# Altium PCB Bender_main.PcbDoc (part 1 of 2)
Units mm, origin at the board's own origin, x right, y up, seen from the top; angles counter-clockwise.
Board outline 153 x 119 mm, 2 copper layers (Top Layer, Bottom Layer); 318 components, 305 nets, 1119 pads, 323 vias.
Unrouted connection lines stored in the file: 2.
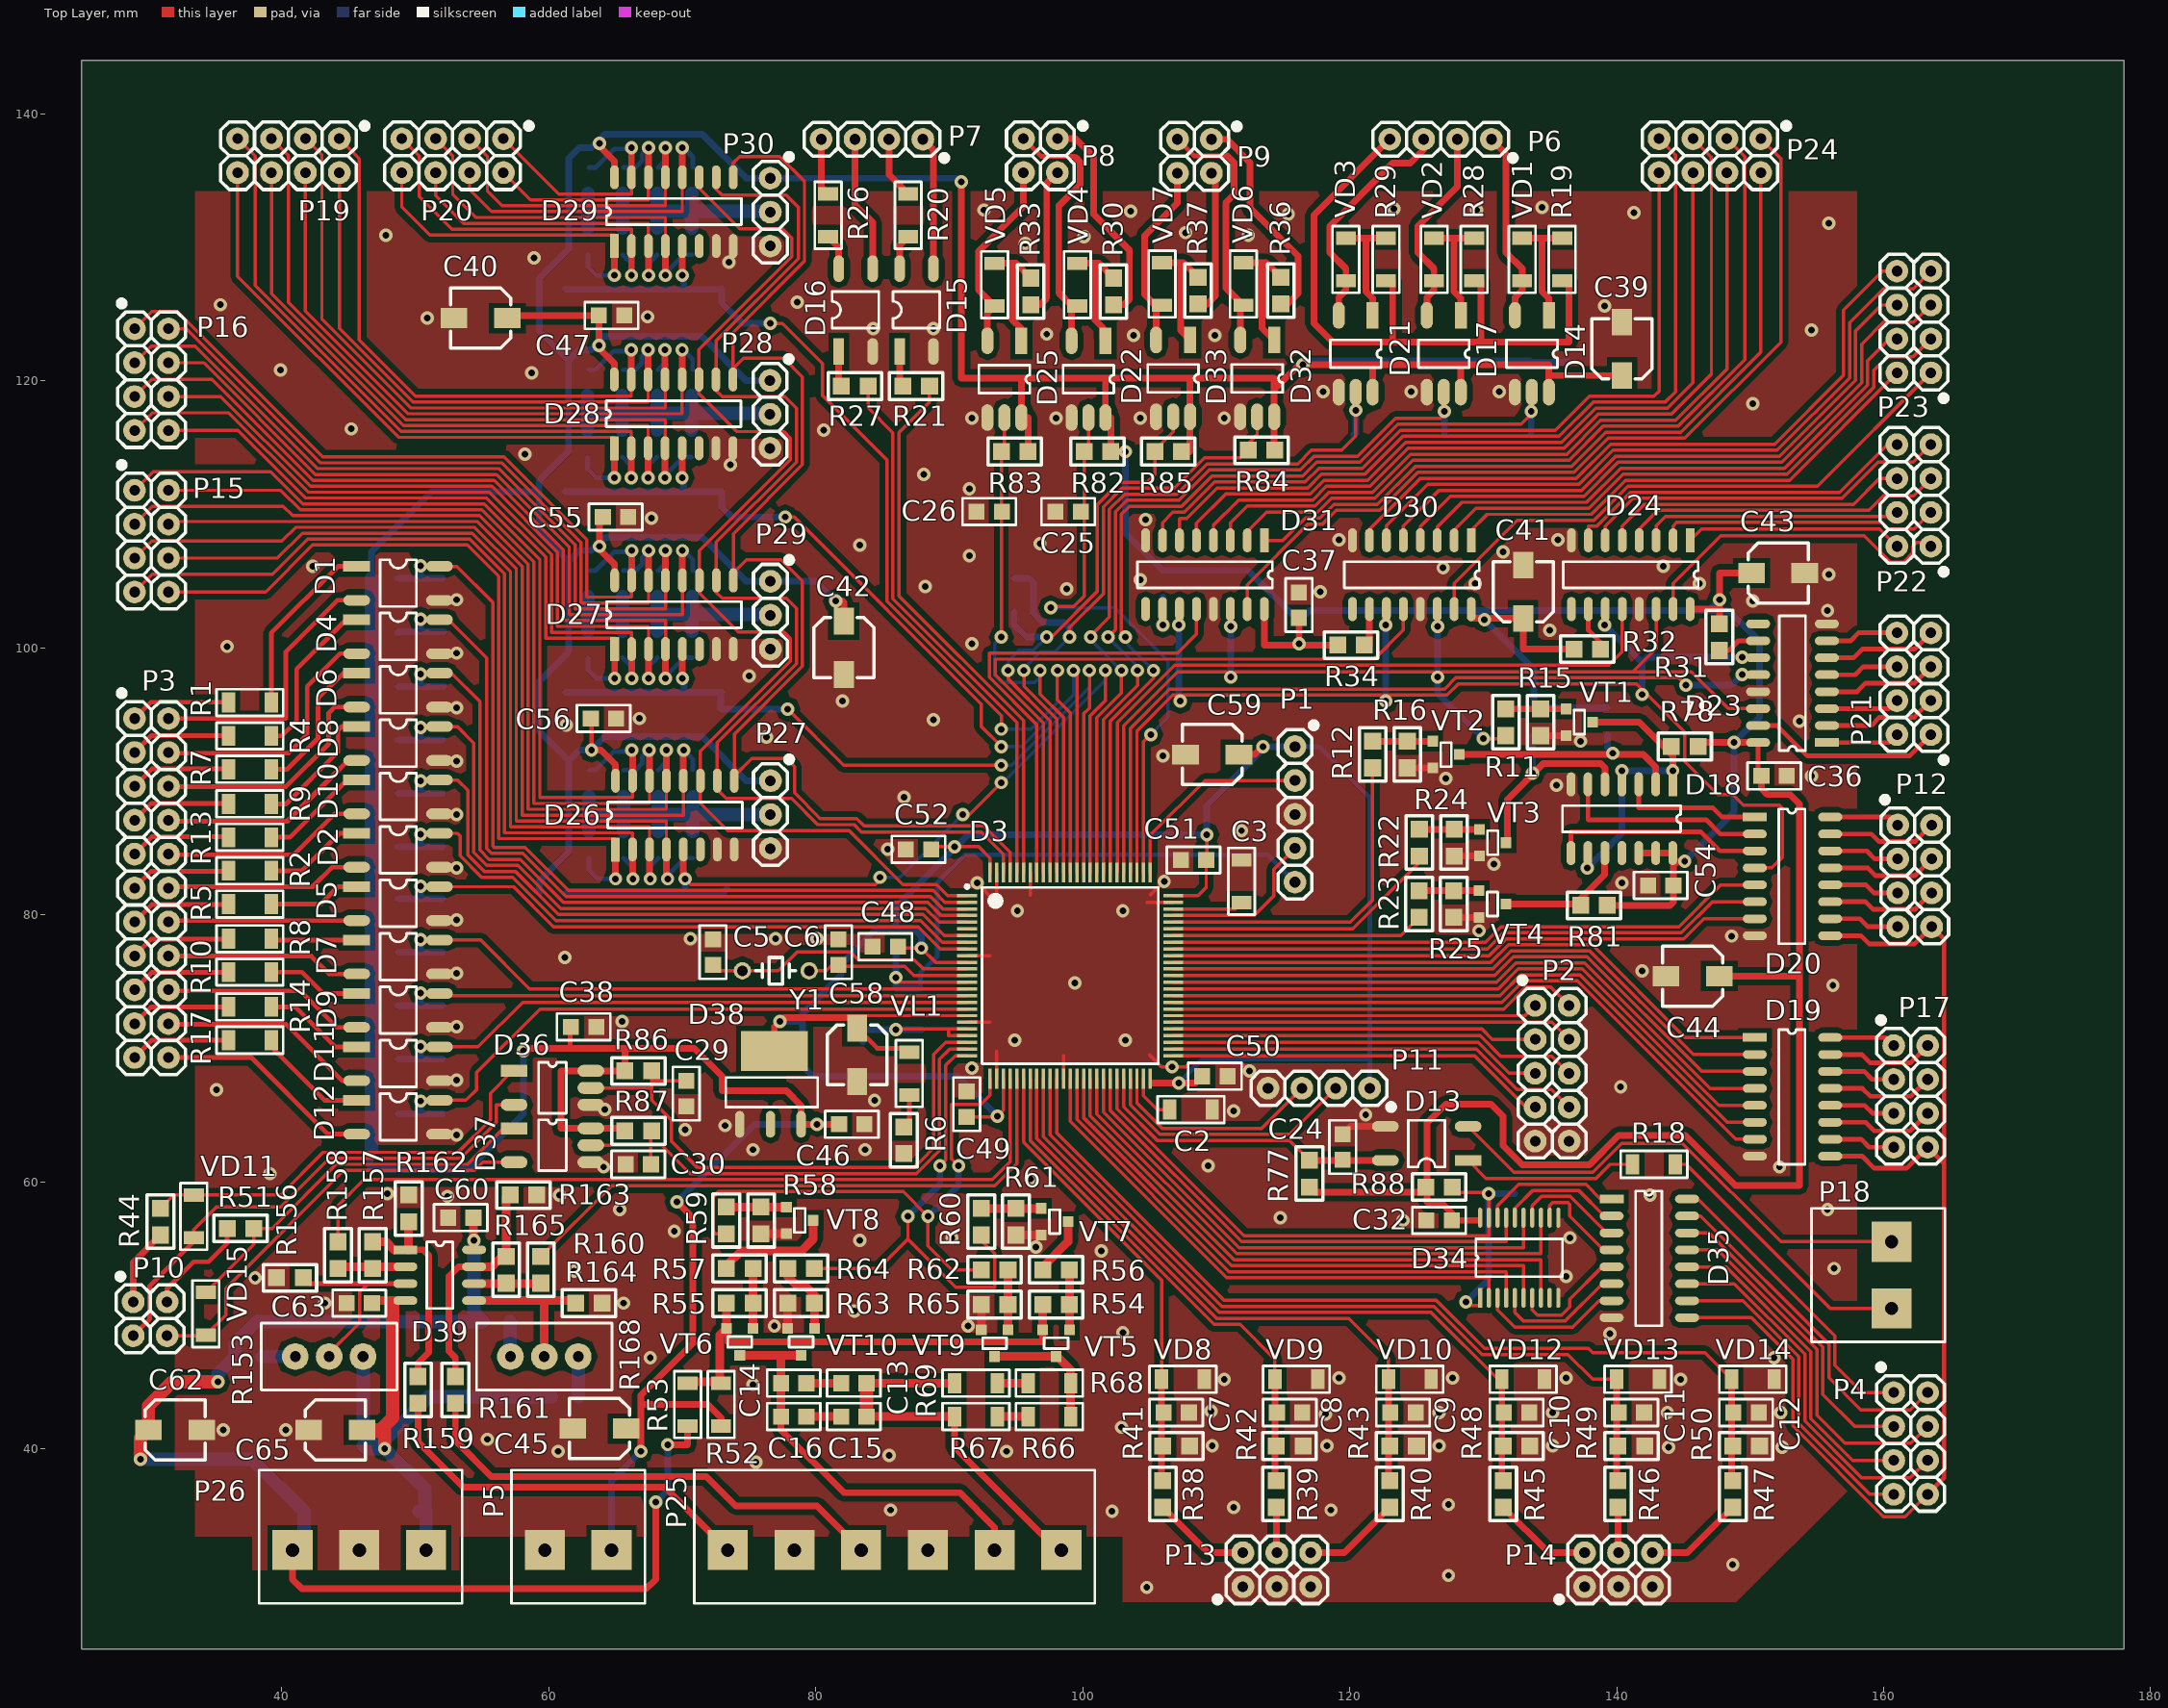
[diagram p0: Top Layer view]
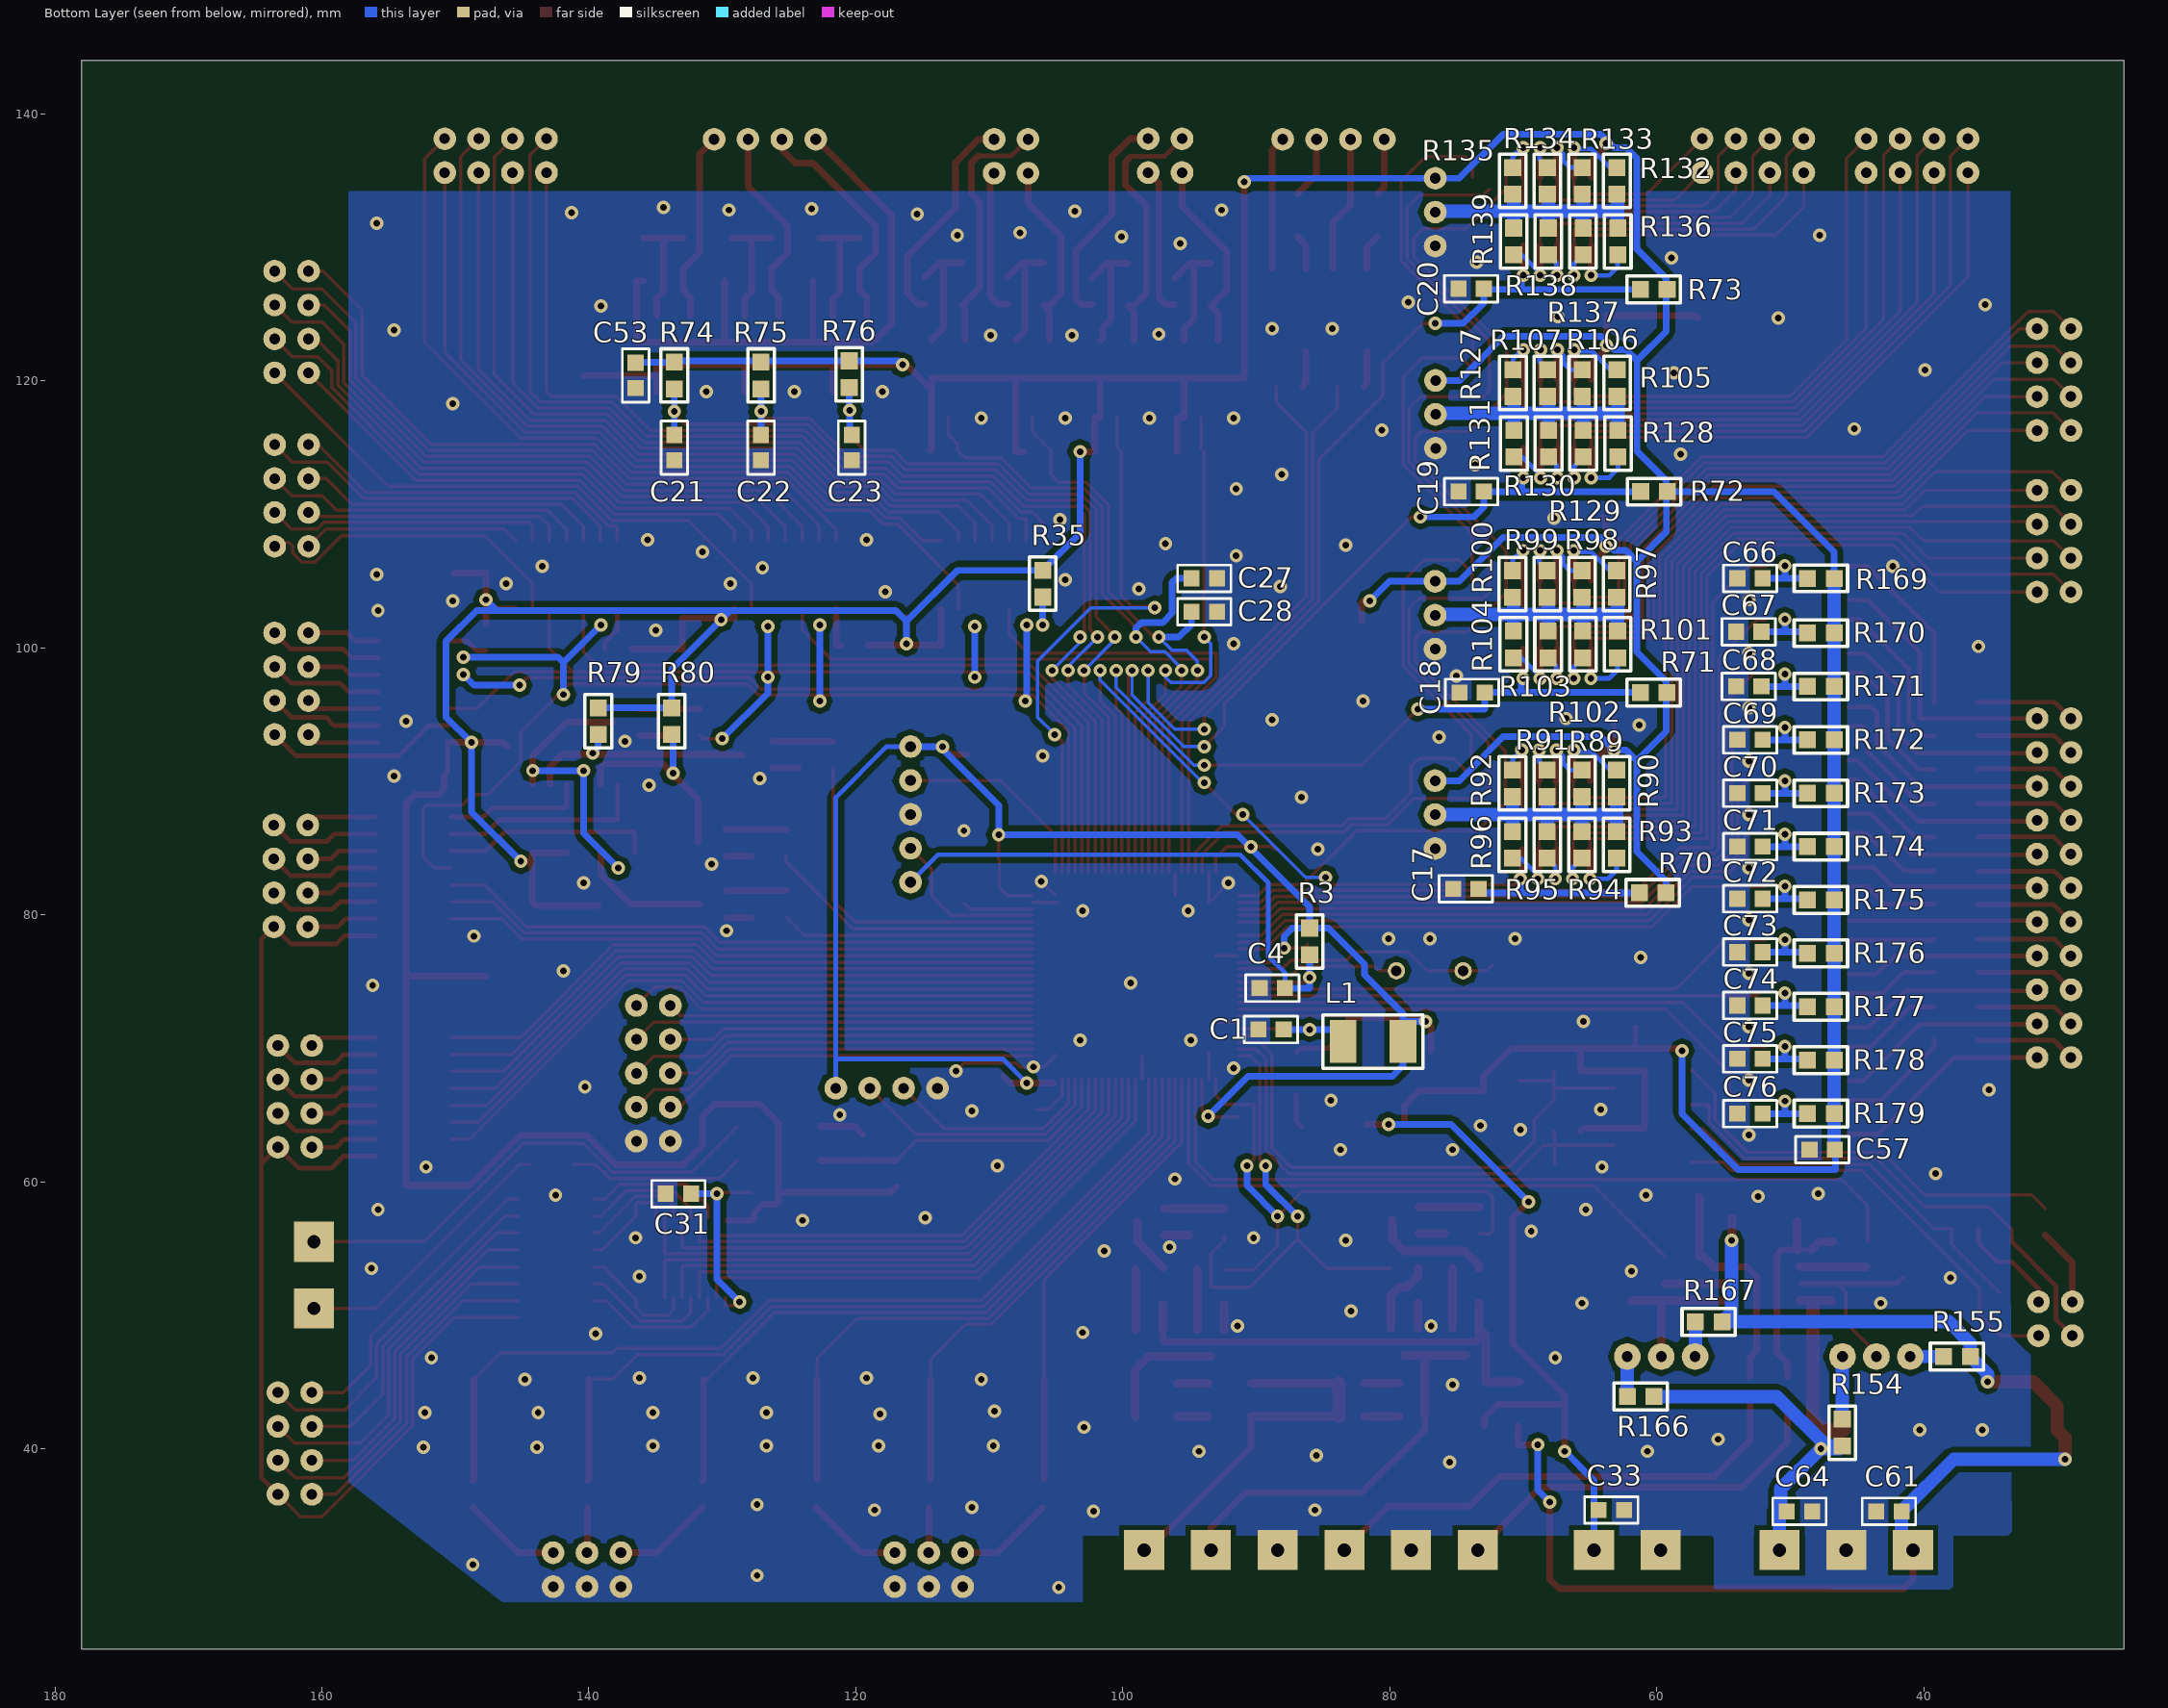
[diagram p1: Bottom Layer view, seen from below]

## Layer stack, top to bottom
Top Solder: solder mask 0.0102, Solder Resist, Dk 3.5
Top Layer: signal copper 0.0356
Dielectric 1: dielectric 0.32, FR-4, Dk 4.8
Bottom Layer: signal copper 0.0356
Bottom Solder: solder mask 0.0102, Solder Resist, Dk 3.5

## Board outline
25,144 25,25 178,25 178,144 25,144

## Design rules (kind name [scope] priority, off if disabled: settings)
Clearance [All] p1: gap=0.2 except(0.4: Arc-Poly Track-Poly SMDPad-Poly THPad-Poly Via-Poly Fill-Poly Poly-Poly)
PolygonConnect [All] p1: connectstyle=Direct reliefconductorwidth=0.254 reliefentries=4 polygonreliefangle="90 Angle" airgapwidth=0.254
RoutingVias [All] p1: holewidth=0.5 width=1 viastyle="Through Hole" minholewidth=0.5 minwidth=1 maxholewidth=4 maxwidth=5
SolderMaskExpansion [All] p1: expansion=0.102
Width [All] p1: maxlimit=4 minlimit=0.22 preferedwidth=0.25
30 further rules are at their usual default settings.

## Classes and differential pairs
component class control_2: C13 C14 C15 C16 R52 R53 R54 R55 R56 R57 R58 R59 R60 R61 R62 R63 R64 R65 R66 R67 R68 R69 VT5 VT6 VT7 VT8 VT9 VT10
component class control: C1 C2 C3 C4 C5 C6 C7 C8 C9 C10 C11 C12 D1 D2 D3 D4 D5 D6 D7 D8 D9 D10 D11 D12 D13 D14 D15 D16 D17 D18 D19 D20 D21 D22 D23 D24 D25 D26 D27 D28 D29 D30 D31 D32 D33 D34 D35 D36 D37 L1 P1 R1 R2 R3 R4 R5 R6 R7 R8 R9 R10 R11 R12 R13 R14 R15 R16 R17 R18 R19 R20 R21 R22 R23 R24 R25 R26 R27 R28 R29 R30 R31 R32 R33 R34 R35 R36 R37 R38 R39 R40 R41 R42 R43 R44 R45 R46 R47 R48 R49 R50 R51 VD1 VD2 VD3 VD4 VD5 VD6 VD7 VD8 VD9 VD10 VD11 VD12 VD13 VD14 VD15 VL1 VT1 VT2 VT3 VT4 Y1
component class Res: C17 C18 C19 C20 C21 C22 C23 C24 C25 C26 C27 C28 C29 C30 C31 C66 C67 C68 C69 C70 C71 C72 C73 C74 C75 C76 P27 P28 P29 P30 R70 R71 R72 R73 R74 R75 R76 R77 R78 R79 R80 R81 R82 R83 R84 R85 R86 R87 R88 R89 R90 R91 R92 R93 R94 R95 R96 R97 R98 R99 R100 R101 R102 R103 R104 R105 R106 R107 R127 R128 R129 R130 R131 R132 R133 R134 R135 R136 R137 R138 R139 R169 R170 R171 R172 R173 R174 R175 R176 R177 R178 R179
component class Supply: C32 C33 C36 C37 C38 C39 C40 C41 C42 C43 C44 C45 C46 C47 C48 C49 C50 C51 C52 C53 C54 C55 C56 C57 C58 C59 D38 P2 P3 P4 P5 P6 P7 P8 P9 P10 P11 P12 P13 P14 P15 P16 P17 P18 P19 P20 P21 P22 P23 P24 P25
component class Task: C60 C61 C62 C63 C64 C65 D39 P26 R153 R154 R155 R156 R157 R158 R159 R160 R161 R162 R163 R164 R165 R166 R167 R168

## Components (designator, comment, footprint, x,y, rotation, side; value= is the part's Value field where it differs from the comment)
C1 "100n" C0805 88.9,71.4 r0 bottom
C2 "2.2u" R1206 108.1,65.4 r0 top
C3 "2.2u" R1206 111.9,82.5 r90 top
C4 "100n" C0805 88.8,74.5 r180 bottom
C5 "22p" C0805 72.3,77.2 r90 top
C6 "22p" C0805 81.7,77.2 r90 top
C7 "100n" C0805 107,42.7 r0 top
C8 "100n" C0805 115.5,42.7 r0 top
C9 "100n" C0805 124,42.7 r0 top
C10 "100n" C0805 132.5,42.7 r0 top
C11 "100n" C0805 141.1,42.7 r0 top
C12 "100n" C0805 149.7,42.7 r0 top
C13 "10n" C0805 82.85,44.9 r0 top
C14 "10n" C0805 78.35,44.9 r0 top
C15 "10n" C0805 82.85,42.4 r0 top
C16 "10n" C0805 78.35,42.4 r0 top
C17 "1n" C0805 74.3,81.94 r0 bottom
C18 "1n" C0805 73.83,96.65 r0 bottom
C19 "1n" C0805 73.9,111.7 r0 bottom
C20 "1n" C0805 73.9,126.9 r0 bottom
C21 "1n" C0805 133.6,115 r270 bottom
C22 "1n" C0805 127.1,115 r270 bottom
C23 "1n" C0805 120.3,115 r270 bottom
C24 "1n" C0805 119.475,62.6 r90 top
C25 "1n" C0805 98.9,110.2 r180 top
C26 "1n" C0805 93,110.2 r180 top
C27 "1n" C0805 93.9,105.2 r180 bottom
C28 "1n" C0805 93.9,102.7 r180 bottom
C29 "1n" C0805 70.3,66.6 r270 top
C30 "1n" C0805 66.7,61.3 r180 top
C31 "100n" C0805 133.3,59.1 r0 bottom
C32 "100n" C0805 126.7,57.1 r180 top
C33 "100n" C0805 63.4,35.4 r180 bottom
C36 "100n" C0805 151.8,90.4 r0 top
C37 "100n" C0805 116.2,103.2 r90 top
C38 "100n" C0805 62.6,71.6 r0 top
C39 "Capacitor_Polyar" SMD_El_SizeA 140.4,120.4 r90 top
C40 "Capacitor_Polyar" SMD_El_SizeA 56.9,124.7 r180 top
C41 "Capacitor_Polyar" SMD_El_SizeA 133,102.2 r90 top
C42 "Capacitor_Polyar" SMD_El_SizeA 82.1,102 r270 top
C43 "Capacitor_Polyar" SMD_El_SizeA 150.1,105.6 r0 top
C44 "Capacitor_Polyar" SMD_El_SizeA 147.7,75.4 r180 top
C45 "Capacitor_Polyar" SMD_El_SizeA 65.8,41.5 r180 top
C46 "100n" C0805 82.7,64.3 r0 top
C47 "100n" C0805 64.7,124.9 r0 top
C48 "100n" C0805 85.2,77.6 r180 top
C49 "100n" C0805 91.3,65.8 r90 top
C50 "100n" C0805 109.9,67.9 r0 top
C51 "100n" C0805 108.3,84.1 r180 top
C52 "100n" C0805 87.7,84.9 r180 top
C53 "100n" C0805 136.5,120.4 r270 bottom
C54 "100n" C0805 143.3,82.2 r180 top
C55 "100n" C0805 65,109.8 r0 top
C56 "100n" C0805 64.1,94.7 r0 top
C57 "100n" C0805 47.6,62.4 r0 bottom
C58 "Capacitor_Polyar" SMD_El_SizeA 83.1,71.5 r270 top
C59 "Capacitor_Polyar" SMD_El_SizeA 111.7,92 r180 top
C60 "100n" C0805 53.4,57.3 r180 top
C61 "100n" C0805 42.6,35.3 r0 bottom
C62 "Capacitor_Polyar" SMD_El_SizeA 30,41.4 r0 top
C63 "100n" C0805 45.8,50.9 r0 top
C64 "100n" C0805 49.3,35.3 r0 bottom
C65 "Capacitor_Polyar" SMD_El_SizeA 42,41.4 r0 top
C66 "100n" C0805 53,105.2 r0 bottom
C67 "100n" C0805 53.1,101.2 r0 bottom
C68 "100n" C0805 53.1,97.1 r0 bottom
C69 "100n" C0805 53,93.1 r0 bottom
C70 "100n" C0805 53,89.1 r0 bottom
C71 "100n" C0805 53,85.1 r0 bottom
C72 "100n" C0805 53,81.2 r0 bottom
C73 "100n" C0805 53,77.2 r0 bottom
C74 "100n" C0805 53,73.2 r0 bottom
C75 "100n" C0805 53,69.2 r0 bottom
C76 "100n" C0805 53,65.1 r0 bottom
D1 "hcpl-181" SOP4 45.6,106.1 r0 top
D2 "hcpl-181" SOP4 45.6,86.1 r0 top
D3 "Stm32F407VGT6" LQFP100 99.06,75.438 r0 top
D4 "hcpl-181" SOP4 45.6,102.1 r0 top
D5 "hcpl-181" SOP4 45.6,82.1 r0 top
D6 "hcpl-181" SOP4 45.6,98.1 r0 top
D7 "hcpl-181" SOP4 45.6,78.1 r0 top
D8 "hcpl-181" SOP4 45.6,94.1 r0 top
D9 "hcpl-181" SOP4 45.6,74.1 r0 top
D10 "hcpl-181" SOP4 45.6,90.1 r0 top
D11 "hcpl-181" SOP4 45.6,70.1 r0 top
D12 "hcpl-181" SOP4 45.6,66.1 r0 top
D13 "hcpl-181" SOP4 128.875,61.6 r180 top
D14 "LTV-601" SOP5 134.92,124.9 r270 top
D15 "hcpl-181" SOP4 86.275,122.201 r90 top
D16 "hcpl-181" SOP4 81.72,122.2 r90 top
D17 "LTV-601" SOP5 128.32,124.9 r270 top
D18 "74HCT132" SO-14 144.2,89.52 r270 top
D19 "ULN2003" SOIC-16 150.4,70.8 r0 top
D20 "ULN2003" SOIC-16 150.4,87.32 r0 top
D21 "LTV-601" SOP5 121.72,124.9 r270 top
D22 "LTV-601" SOP5 101.7,123 r270 top
D23 "74HC595" SOP16_595 155.5,92.9 r180 top
D24 "74HC595" SOP16_595 145.5,107.8 r270 top
D25 "LTV-601" SOP5 95.4,123 r270 top
D26 "74HC251" SOP16_595 65,85.14 r90 top
D27 "74HC251" SOP16_595 64.93,100.15 r90 top
D28 "74HC251" SOP16_595 64.9,115.2 r90 top
D29 "74HC251" SOP16_595 64.92,130.35 r90 top
D30 "74HC595" SOP16_595 129.1,107.8 r270 top
D31 "74HC595" SOP16_595 113.6,107.8 r270 top
D32 "LTV-601" SOP5 114.34,123.06 r270 top
D33 "LTV-601" SOP5 108.04,123.06 r270 top
D34 "HCT244PW" TSSOP20 129.775,51.3 r90 top
D35 "ULN2003" SOIC-16 139.675,58.7 r0 top
D36 "LTV-601" SOP5 57.4,68.3 r0 top
D37 "LTV-601" SOP5 57.4,64 r0 top
D38 "1117" SOT223 78.9,71.3 r270 top
D39 "LM358" SOIC-8 49.5,54.9 r0 top
L1 "L" L 79,70.5 r0 bottom
P1 "Con_5" Con_5 115.9,92.6 r270 top
P2 "Con_5x2" Con_5x2 133.9,73.2 r270 top
P3 "Con_11x2" Con_11x2 31.5,94.7 r270 top
P4 "Con_4x2" Con_4_2 163.3,44.2 r270 top
P5 "KLS_2" KLS-2 59.7,32.4 r0 top
P6 "Con_4" Con_4 130.62,138.1 r180 top
P7 "Con_4" Con_4 88.02,138.1 r180 top
P8 "Con_2x2" Con_2x2 98.1,135.6 r180 top
P9 "Con_2x2" Con_2x2 109.64,135.56 r180 top
P10 "Con_2x2" Con_2x2 31.4,51 r270 top
P11 "Con_4" Con_4 121.5,67 r180 top
P12 "Con_4x2" Con_4_2 163.6,86.72 r270 top
P13 "Con_3x2" Con_3x2 112,32.2 r0 top
P14 "Con_3x2" Con_3x2 137.6,32.2 r0 top
P15 "Con_4x2" Con_4_2 31.5,111.8 r270 top
P16 "Con_4x2" Con_4_2 31.5,123.9 r270 top
P17 "Con_4x2" Con_4_2 163.3,70.2 r270 top
P18 "KLS_2" KLS-2 160.6,50.5 r90 top
P19 "Con_4x2" Con_4_2 44.3,135.6 r180 top
P20 "Con_4x2" Con_4_2 56.6,135.6 r180 top
P21 "Con_4x2" Con_4_2 161,93.5 r90 top
P22 "Con_4x2" Con_4_2 161,107.6 r90 top
P23 "Con_4x2" Con_4_2 161,120.6 r90 top
P24 "Con_4x2" Con_4_2 150.8,135.6 r180 top
P25 "KLS_6_5mm" KLS_6_5MM 73.4,32.4 r0 top
P26 "KLS_3_5mm" KLS_3_5MM 40.8,32.4 r0 top
P27 "Con_3" CON_3 76.6,90.04 r270 top
P28 "Con_3" CON_3 76.57,120.03 r270 top
P29 "Con_3" CON_3 76.6,104.98 r270 top
P30 "Con_3" CON_3 76.59,135.18 r270 top
R1 "2.4k" R1206 37.6,95.9 r0 top
R2 "2.4k" R1206 37.6,83.3 r0 top
R3 "10k" R0805 86,79 r270 bottom
R4 "2.4k" R1206 37.6,93.4 r0 top
R5 "2.4k" R1206 37.6,80.8 r0 top
R6 "1k" R0805 86.6,62.1 r90 top
R7 "2.4k" R1206 37.6,90.9 r0 top
R8 "2.4k" R1206 37.6,78.2 r0 top
R9 "2.4k" R1206 37.6,88.3 r0 top
R10 "2.4k" R1206 37.6,75.7 r0 top
R11 "1k" R0805 131.7,93.42 r90 top
R12 "1k" R0805 121.72,91 r90 top
R13 "2.4k" R1206 37.6,85.8 r0 top
R14 "2.4k" R1206 37.6,73.1 r0 top
R15 "10k" R0805 134.3,93.42 r90 top
R16 "10k" R0805 124.32,91 r90 top
R17 "2.4k" R1206 37.6,70.6 r0 top
R18 "2.4k" R1206 142.8,61.3 r180 top
R19 "2.4k" R1206 135.92,129.1 r90 top
R20 "2.4k" R1206 86.92,132.4 r270 top
R21 "100" R0805 86.52,119.6 r0 top
R22 "1k" R0805 125.22,84.4 r90 top
R23 "1k" R0805 125.2,79.8 r90 top
R24 "10k" R0805 127.82,84.4 r90 top
R25 "10k" R0805 127.8,79.8 r90 top
R26 "2.4k" R1206 80.92,132.4 r270 top
R27 "100" R0805 81.92,119.6 r0 top
R28 "2.4k" R1206 129.32,129.1 r90 top
R29 "2.4k" R1206 122.72,129.1 r90 top
R30 "270" R0805 102.3,125.7 r90 top
R31 "2k" R0805 147.7,99.8 r90 top
R32 "2k" R0805 138.8,99.9 r180 top
R33 "270" R0805 96.1,125.7 r90 top
R34 "2k" R0805 121.1,100.2 r180 top
R35 "2k" R0805 106,103.8 r90 bottom
R36 "470" R0805 114.84,125.76 r90 top
R37 "470" R0805 108.64,125.76 r90 top
R38 "2k" R0805 106,35.6 r90 top
R39 "2k" R0805 114.5,35.6 r90 top
R40 "2k" R0805 123,35.6 r90 top
R41 "1k" R0805 108,40.2 r180 top
R42 "1k" R0805 116.5,40.2 r180 top
R43 "1k" R0805 125,40.2 r180 top
R44 "270" R0805 30.9,56 r90 top
R45 "2k" R0805 131.5,35.6 r90 top
R46 "2k" R0805 140.1,35.6 r90 top
R47 "2k" R0805 148.7,35.6 r90 top
R48 "1k" R0805 133.5,40.2 r180 top
R49 "1k" R0805 142.1,40.2 r180 top
R50 "1k" R0805 150.7,40.2 r180 top
R51 "270" R0805 35.9,56.5 r0 top
R52 "0" R1206 72.9,43.3 r270 top
R53 "0" R1206 70.4,43.3 r270 top
R54 "1k" R0805 99,50.8 r180 top
R55 "1k" R0805 75.3,50.9 r180 top
R56 "1k" R0805 99,53.4 r180 top
R57 "1k" R0805 73.3,53.5 r0 top
R58 "1k" R0805 75.9,56.1 r90 top
R59 "1k" R0805 73.3,56.1 r90 top
R60 "1k" R0805 92.4,56 r90 top
R61 "1k" R0805 95,56 r90 top
R62 "1k" R0805 94.4,53.4 r180 top
R63 "1k" R0805 77.9,50.9 r0 top
R64 "1k" R0805 79.9,53.5 r180 top
R65 "1k" R0805 92.4,50.8 r0 top
R66 "270" R1206 97.5,42.4 r0 top
R67 "270" R1206 92,42.4 r0 top
R68 "270" R1206 97.5,44.9 r0 top
R69 "270" R1206 92,44.9 r0 top
R70 "680" R0805 61.3,81.64 r180 bottom
R71 "680" R0805 61.23,96.65 r180 bottom
R72 "680" R0805 61.2,111.7 r180 bottom
R73 "680" R0805 61.22,126.85 r180 bottom
R74 "680" R0805 133.6,119.4 r90 bottom
R75 "680" R0805 127.1,119.4 r90 bottom
R76 "680" R0805 120.5,119.5 r90 bottom
R77 "680" R0805 116.975,61.6 r270 top
R78 "680" R0805 144.1,92.6 r0 top
R79 "680" R0805 139.3,93.5 r90 bottom
R80 "680" R0805 133.8,93.5 r90 bottom
R81 "680" R0805 137.3,80.7 r0 top
R82 "680" R0805 100.1,114.7 r0 top
R83 "680" R0805 93.9,114.7 r0 top
R84 "680" R0805 112.4,114.8 r0 top
R85 "680" R0805 105.4,114.7 r0 top
R86 "680" R0805 67.7,68.3 r180 top
R87 "680" R0805 67.7,63.8 r180 top
R88 "680" R0805 127.7,59.6 r180 top
R89 "680" R0805 63,90.84 r270 bottom
R90 "680" R0805 65.6,90.84 r270 bottom
R91 "680" R0805 68.2,90.84 r270 bottom
R92 "680" R0805 70.8,90.84 r270 bottom
R93 "680" R0805 63,84.24 r90 bottom
R94 "680" R0805 65.6,84.24 r90 bottom
R95 "680" R0805 68.2,84.24 r90 bottom
R96 "680" R0805 70.8,84.24 r90 bottom
R97 "680" R0805 63,105.78 r270 bottom
R98 "680" R0805 65.6,105.78 r270 bottom
R99 "680" R0805 68.2,105.78 r270 bottom
R100 "680" R0805 70.8,105.78 r270 bottom
R101 "680" R0805 62.93,99.25 r90 bottom
R102 "680" R0805 65.53,99.25 r90 bottom
R103 "680" R0805 68.13,99.25 r90 bottom
R104 "680" R0805 70.73,99.25 r90 bottom
R105 "680" R0805 62.97,120.83 r270 bottom
R106 "680" R0805 65.57,120.83 r270 bottom
R107 "680" R0805 68.17,120.83 r270 bottom
R127 "680" R0805 70.77,120.83 r270 bottom
R128 "680" R0805 62.9,114.3 r90 bottom
R129 "680" R0805 65.5,114.3 r90 bottom
R130 "680" R0805 68.1,114.3 r90 bottom
R131 "680" R0805 70.7,114.3 r90 bottom
R132 "680" R0805 62.99,135.98 r270 bottom
R133 "680" R0805 65.59,135.98 r270 bottom
R134 "680" R0805 68.19,135.98 r270 bottom
R135 "680" R0805 70.79,135.98 r270 bottom
R136 "680" R0805 62.92,129.45 r90 bottom
R137 "680" R0805 65.52,129.45 r90 bottom
R138 "680" R0805 68.12,129.45 r90 bottom
R139 "680" R0805 70.72,129.45 r90 bottom
R153 "20k" RES_POT_1 41,46.9 r0 top
R154 "10k" R0805 46.1,42.2 r270 bottom
R155 "10k" R0805 36.5,46.9 r0 bottom
R156 "10k" R0805 41.6,52.8 r180 top
R157 "5.1k" R0805 46.8,55.5 r270 top
R158 "1k" R0805 44.2,53.5 r90 top
R159 "1k" R0805 50.2,43.4 r90 top
R160 "1k" R0805 59.4,52.4 r90 top
R161 "1k" R0805 53,43.4 r90 top
R162 "10k" R0805 49.5,59 r270 top
R163 "10k" R0805 59.1,59 r180 top
R164 "10k" R0805 62,50.9 r0 top
R165 "5.1k" R0805 56.8,54.4 r270 top
R166 "10k" R0805 62.2,43.9 r180 bottom
R167 "10k" R0805 55.1,49.5 r0 bottom
R168 "20k" RES_POT_1 62.2,46.9 r180 top
R169 "680" R0805 48.7,105.2 r180 bottom
R170 "680" R0805 48.7,101.1 r180 bottom
R171 "680" R0805 48.7,97.1 r180 bottom
R172 "680" R0805 48.7,93.1 r180 bottom
R173 "680" R0805 48.7,89.1 r180 bottom
R174 "680" R0805 48.7,85.1 r180 bottom
R175 "680" R0805 48.7,81.1 r180 bottom
R176 "680" R0805 48.7,77.1 r180 bottom
R177 "680" R0805 48.7,73.1 r180 bottom
R178 "680" R0805 48.7,69.1 r180 bottom
R179 "680" R0805 48.7,65.1 r180 bottom
VD1 "LL4448" R1206 132.92,129.1 r90 top
VD2 "LL4448" R1206 126.32,129.1 r90 top
VD3 "LL4448" R1206 119.72,129.1 r90 top
VD4 "LL4448" R1206 99.6,127.2 r90 top
VD5 "LL4448" R1206 93.4,127.2 r90 top
VD6 "LL4448" R1206 112.04,127.26 r90 top
VD7 "LL4448" R1206 105.94,127.26 r90 top
VD8 "3.6V" R1206 107.5,45.2 r180 top
VD9 "3.6V" R1206 116,45.2 r180 top
VD10 "3.6V" R1206 124.5,45.2 r180 top
VD11 "LL4448" R1206 33.4,57.4 r90 top
VD12 "3.6V" R1206 133,45.2 r180 top
VD13 "3.6V" R1206 141.6,45.2 r180 top
VD14 "3.6V" R1206 150.2,45.2 r180 top
VD15 "LL4448" R1206 34.3,50.1 r90 top
VL1 "LED_1206" R1206 87,68.1 r270 top
VT1 "BC817" SOT-23 138.2,95.42 r270 top
VT2 "BC817" SOT-23 128.22,93 r270 top
VT3 "BC817" SOT-23 131.72,86.4 r270 top
VT4 "BC817" SOT-23 131.7,81.8 r270 top
VT5 "BC807" SOT-23 99,46.9 r180 top
VT6 "BC807" SOT-23 75.3,47 r180 top
VT7 "BC817" SOT-23 98.9,58 r270 top
VT8 "BC817" SOT-23 79.8,58.1 r270 top
VT9 "BC817" SOT-23 94.4,46.9 r180 top
VT10 "BC817" SOT-23 79.9,47 r180 top
Y1 "8MHz" Crystal 79.5,75.8 r180 top

## Footprints (in the part's own frame and the unit in brackets; to place one, negate y for a bottom-side part, rotate by r counter-clockwise, add the part's x,y. Pads: shape width x height; smd on the part's side, far side on the other; paste and mask are expansions set on the pad)
C0805 [mm]
  rect 1.2x1.2 smd: 1(-0.95,0) 2(0.95,0)
  silkscreen extent -2,-1 2,1
Con_2x2 [mm]
  round 1.7 hole 0.8: 1(0,-2.54) 2(0,0) 3(2.54,-2.54) 4(2.54,0)
  silkscreen extent -2.1,-3.81 3.81,1.27
CON_3 [mm]
  round 1.7 hole 0.8: 1(0,0) 2(2.54,0) 3(5.08,0)
  silkscreen extent -1.8,-1.27 6.35,1.6
Con_3x2 [mm]
  round 1.7 hole 0.8: 1(0,-2.54) 2(0,0) 3(2.54,-2.54) 4(2.54,0) 5(5.08,-2.54) 6(5.08,0)
  silkscreen extent -2.1,-3.81 6.35,1.27
Con_4 [mm]
  round 1.7 hole 0.8: 1(0,0) 2(2.54,0) 3(5.08,0) 4(7.62,0)
  silkscreen extent -1.8,-1.27 8.89,1.6
Con_4_2 [mm]
  round 1.7 hole 0.8: 1(0,-2.54) 2(0,0) 3(2.54,-2.54) 4(2.54,0) 5(5.08,-2.54) 6(5.08,0) 7(7.62,-2.54) 8(7.62,0)
  silkscreen extent -2.1,-3.81 8.89,1.27
Con_5 [mm]
  round 1.7 hole 0.8: 1(0,0) 2(2.54,0) 3(5.08,0) 4(7.62,0) 5(10.16,0)
  silkscreen extent -1.8,-1.27 11.43,1.6
Con_5x2 [mm]
  round 1.7 hole 0.8: 1(0,0) 2(0,2.54) 3(2.54,0) 4(2.54,2.54) 5(5.08,0) 6(5.08,2.54) 7(7.62,0) 8(7.62,2.54) 9(10.16,0) 10(10.16,2.54)
  silkscreen extent -2.1,-1.27 11.43,3.81
Con_11x2 [mm]
  round 1.7 hole 0.8: 1(0,-2.54) 2(0,0) 3(2.54,-2.54) 4(2.54,0) 5(5.08,-2.54) 6(5.08,0) 7(7.62,-2.54) 8(7.62,0) 9(10.16,-2.54) 10(10.16,0) 11(12.7,-2.54) 12(12.7,0) 13(15.24,-2.54) 14(15.24,0) 15(17.78,-2.54) 16(17.78,0) 17(20.32,-2.54) 18(20.32,0) 19(22.86,-2.54) 20(22.86,0) 21(25.4,-2.54) 22(25.4,0)
  silkscreen extent -2.1,-3.81 26.67,1.27
Crystal [mm]
  round 1.3 hole 0.8: 1(0,0) 2(5,0)
  silkscreen extent 1,-1 4,1
KLS-2 [mm]
  rect 3x3 hole 1: 1(0,0) 2(5,0)
  silkscreen extent -2.5,-4 7.5,6
KLS_3_5MM [mm]
  rect 3x3 hole 1: 1(0,0) 2(5,0) 3(10,0)
  silkscreen extent -2.5,-4 12.7,6
KLS_6_5MM [mm]
  rect 3x3 hole 1: 1(0,0) 2(5,0) 3(10,0) 4(15,0) 5(20,0) 6(25,0)
  silkscreen extent -2.5,-4 27.5,6
L [mm]
  rect 2x3.2 smd: 1(0,0) 2(4.5,0)
  silkscreen extent -1.5,-2 6,2
LQFP100 [mm] "LQFP, 100-Leads, Body 14,00x14,00mm, Pitch 0,50mm, IPC Medium Density"
  rect 1.5x0.25 smd: 1(-7.725,6) 2(-7.725,5.5) 3(-7.725,5) 4(-7.725,4.5) 5(-7.725,4) 6(-7.725,3.5) 7(-7.725,3) 8(-7.725,2.5) 9(-7.725,2) 10(-7.725,1.5) 11(-7.725,1) 12(-7.725,0.5) 13(-7.725,0) 14(-7.725,-0.5) 15(-7.725,-1) 16(-7.725,-1.5) 17(-7.725,-2) 18(-7.725,-2.5) 19(-7.725,-3) 20(-7.725,-3.5) 21(-7.725,-4) 22(-7.725,-4.5) 23(-7.725,-5) 24(-7.725,-5.5) 25(-7.725,-6) 51(7.725,-6) 52(7.725,-5.5) 53(7.725,-5) 54(7.725,-4.5) 55(7.725,-4) 56(7.725,-3.5) 57(7.725,-3) 58(7.725,-2.5) 59(7.725,-2) 60(7.725,-1.5) 61(7.725,-1) 62(7.725,-0.5) 63(7.725,0) 64(7.725,0.5) 65(7.725,1) 66(7.725,1.5) 67(7.725,2) 68(7.725,2.5) 69(7.725,3) 70(7.725,3.5) 71(7.725,4) 72(7.725,4.5) 73(7.725,5) 74(7.725,5.5) 75(7.725,6)
  rect 0.25x1.5 smd: 26(-6,-7.725) 27(-5.5,-7.725) 28(-5,-7.725) 29(-4.5,-7.725) 30(-4,-7.725) 31(-3.5,-7.725) 32(-3,-7.725) 33(-2.5,-7.725) 34(-2,-7.725) 35(-1.5,-7.725) 36(-1,-7.725) 37(-0.5,-7.725) 38(0,-7.725) 39(0.5,-7.725) 40(1,-7.725) 41(1.5,-7.725) 42(2,-7.725) 43(2.5,-7.725) 44(3,-7.725) 45(3.5,-7.725) 46(4,-7.725) 47(4.5,-7.725) 48(5,-7.725) 49(5.5,-7.725) 50(6,-7.725) 76(6,7.725) 77(5.5,7.725) 78(5,7.725) 79(4.5,7.725) 80(4,7.725) 81(3.5,7.725) 82(3,7.725) 83(2.5,7.725) 84(2,7.725) 85(1.5,7.725) 86(1,7.725) 87(0.5,7.725) 88(0,7.725) 89(-0.5,7.725) 90(-1,7.725) 91(-1.5,7.725) 92(-2,7.725) 93(-2.5,7.725) 94(-3,7.725) 95(-3.5,7.725) 96(-4,7.725) 97(-4.5,7.725) 98(-5,7.725) 99(-5.5,7.725) 100(-6,7.725)
  silkscreen extent -7.85,-6.6 6.6,6.8, body extent -7,-7 7,7, height 1.8
R0805 [mm]
  rect 1.27x1.27 smd: 1(0,0) 2(2,0)
  silkscreen extent -1,-1 3,1
R1206 [mm]
  rect 1x1.5 smd: 1(-1.6,0) 2(1.6,0)
  silkscreen extent -2.5,-1 2.5,1
RES_POT_1 [mm]
  round 2 hole 0.8: 1(0,0) 2(5.08,0) 3(2.54,0)
  silkscreen extent -2.54,-2.5 7.62,2.5
SMD_El_SizeA [mm]
  rect 2x1.5 smd: 1(0,0) 2(4,0)
  silkscreen extent -0.25,-2.25 4.25,2.25
SO-14 [mm]
  rect 1.8x0.65 smd: 1(-0.25,0)
  oval 1.8x0.65 smd: 2(-0.25,-1.27) 3(-0.25,-2.54) 4(-0.25,-3.81) 5(-0.25,-5.08) 6(-0.25,-6.35) 7(-0.25,-7.62) 8(4.9,-7.62) 9(4.9,-6.35) 10(4.9,-5.08) 11(4.9,-3.81) 12(4.9,-2.54) 13(4.9,-1.27) 14(4.9,0)
  silkscreen extent 1.35,-8.25 3.31,0.6
SOIC-8 [mm]
  rect 1.8x0.65 smd: 1(-0.25,0)
  oval 1.8x0.65 smd: 2(-0.25,-1.27) 3(-0.25,-2.54) 4(-0.25,-3.81) 5(4.9,-3.81) 6(4.9,-2.54) 7(4.9,-1.27) 8(4.9,0)
  silkscreen extent 1.35,-4.4 3.31,0.6
SOIC-16 [mm]
  rect 1.8x0.65 smd: 1(-0.05,0)
  oval 1.8x0.65 smd: 2(-0.05,-1.27) 3(-0.05,-2.54) 4(-0.05,-3.81) 5(-0.05,-5.08) 6(-0.05,-6.35) 7(-0.05,-7.62) 8(-0.05,-8.89) 9(5.6,-8.89) 10(5.6,-7.62) 11(5.6,-6.35) 12(5.6,-5.08) 13(5.6,-3.81) 14(5.6,-2.54) 15(5.6,-1.27) 16(5.6,0)
  silkscreen extent 1.75,-9.5 3.71,0.6
SOP4 [mm]
  rect 2x0.8 smd: 1(0,0)
  oval 2x0.8 smd: 2(0,-2.54) 3(6.2,-2.54) 4(6.2,0)
  silkscreen extent 1.75,-3 4.48,0.5
SOP5 [mm]
  rect 2x0.9 smd: 1(0,0)
  oval 2x0.9 smd: 3(0,-2.54) 4(5.75,-2.54) 5(5.75,-1.27) 6(5.75,0)
  silkscreen extent 1.84,-3.17 3.92,0.64
SOP16_595 [mm]
  rect 1.8x0.65 smd: 1(-0.25,0)
  oval 1.8x0.65 smd: 2(-0.25,-1.27) 3(-0.25,-2.54) 4(-0.25,-3.81) 5(-0.25,-5.08) 6(-0.25,-6.35) 7(-0.25,-7.62) 8(-0.25,-8.89) 9(4.9,-8.89) 10(4.9,-7.62) 11(4.9,-6.35) 12(4.9,-5.08) 13(4.9,-3.81) 14(4.9,-2.54) 15(4.9,-1.27) 16(4.9,0)
  silkscreen extent 1.35,-9.5 3.31,0.6
SOT223 [mm]
  oval 2x0.7 smd: 1(7,0) 2(7,-2.3) 3(7,-4.6)
  rect 3x5 smd: 2(1.5,-2)
  silkscreen extent 3.5,-5.65 5.72,1.25
SOT-23 [mm]
  rect 0.8x0.8 smd: 1(0,-2) 2(2,-2) 3(1,0)
  silkscreen extent 0.1,-1.4 1.9,-0.6
TSSOP20 [mm]
  rect 1.5x0.3 smd: 1(0,0)
  oval 1.5x0.3 smd: 2(0,-0.65) 3(0,-1.3) 4(0,-1.95) 5(0,-2.6) 6(0,-3.25) 7(0,-3.9) 8(0,-4.55) 9(0,-5.2) 10(0,-5.85) 11(6,-5.85) 12(6,-5.2) 13(6,-4.55) 14(6,-3.9) 15(6,-3.25) 16(6,-2.6) 17(6,-1.95) 18(6,-1.3) 19(6,-0.65) 20(6,0)
  silkscreen extent 1.58,-6.18 4.42,0.33

## Part data
C1 C4 C5 C6 C7 C8 C9 C10 C11 C12 C13 C14 C15 C16 C17 C18 C19 C20 C21 C22 C23 C24 C25 C26 C27 C28 C29 C30 C31 C32 C33 C36 C37 C38 C46 C47 C48 C49 C50 C51 C52 C53 C54 C55 C56 C57 C60 C61 C63 C64 C66 C67 C68 C69 C70 C71 C72 C73 C74 C75 C76: library part C0805
C2 C3: library part Tantal_2.2
D38: library part 7833_SOT223
R1 R2 R4 R5 R7 R8 R9 R10 R13 R14 R17 R18 R19 R20 R26 R28 R29 R52 R53 R66 R67 R68 R69: library part R1206
R3 R6 R11 R12 R15 R16 R21 R22 R23 R24 R25 R27 R30 R31 R32 R33 R34 R35 R36 R37 R38 R39 R40 R41 R42 R43 R44 R45 R46 R47 R48 R49 R50 R51 R54 R55 R56 R57 R58 R59 R60 R61 R62 R63 R64 R65 R70 R71 R72 R73 R74 R75 R76 R77 R78 R79 R80 R81 R82 R83 R84 R85 R86 R87 R88 R89 R90 R91 R92 R93 R94 R95 R96 R97 R98 R99 R100 R101 R102 R103 R104 R105 R106 R107 R127 R128 R129 R130 R131 R132 R133 R134 R135 R136 R137 R138 R139 R154 R155 R156 R157 R158 R159 R160 R161 R162 R163 R164 R165 R166 R167 R169 R170 R171 R172 R173 R174 R175 R176 R177 R178 R179: library part R0805
R153 R168: library part Res_Pot_1
VD8 VD9 VD10 VD12 VD13 VD14: library part Zener
VT1 VT2 VT3 VT4 VT7 VT8 VT9 VT10: library part NPN
VT5 VT6: library part PNP
Y1: library part Crystal

## Via types
v1: diameter 1, hole 0.5, Top Layer to Bottom Layer, 323 vias

## Nets (pads, with @x,y where several pads share a name; then routed paths per layer and width w, separated by ;. In a path a pad name is that pad's centre, name@x,y a point inside that pad or via, vN(x,y) a via of type N, cw(c..) or ccw(c..) an arc to the next point about the centre after c; other vN are vias at no path point)
+5V: C32.1 C33.1 C36.1 C37.1 C38.1 C39.1 C40.1 C41.1 C42.1 C43.1 C44.1 C45.1 C46.1 C47.1 C53.1 C54.1 C55.1 C56.1 C57.1 D14.6 D17.6 D18.12 D18.13 D18.14 D21.6 D22.6 D23.16 D24.16 D25.6 D26.16 D27.16 D28.16 D29.16 D30.16 D31.16 D32.6 D33.6 D34.20 D36.6 D37.6 D38.1 P5.2 P27.1 P28.1 P29.1 P30.1 R31.2 R32.2 R34.2 R35.2 R52.2 R70.2 R71.2 R72.2 R73.2 R74.2 R75.2 R76.2 R77.2 R78.2 R79.2 R80.2 R81.2 R82.2 R83.2 R84.2 R85.2 R86.2 R87.2 R88.2 R169.2 R170.2 R171.2 R172.2 R173.2 R174.2 R175.2 R176.2 R177.2 R178.2 R179.2 | length 701.9
  Top Layer w0.35: 61.6,70 61.6,71.6 C38.1@61.65,71.6 ; C56.1@63.15,94.7 63.2,94.65 v1(63.2,92.34) ; D23.16@150.6,92.9 150.6,90.65 C36.1@150.85,90.4
  Top Layer w0.5: C40.1@56.9,124.7 57.1,124.9 C47.1@63.75,124.9 63.77,124.88 v1(63.77,122.65) ; v1(58.1,69.8) 58.3,70 61.6,70 65.8,70 ; v1(63.2,92.34) 63.9,92.34 65,91.24 D26.16@65,90.04 ; v1@63.77,122.43 64.9,121.3 D28.16@64.9,120.1 ; v1@63.79,137.58 64.92,136.45 D29.16@64.92,135.25 ; C55.1@64.05,109.8 63.8,109.55 v1(63.8,107.6) 63.8,107.38 64.93,106.25 D27.16@64.93,105.05 ; R87.2@65.7,63.8 65.5,64 D37.6@63.15,64 60.9,64 60.9,68.3 D36.6@63.15,68.3 R86.2@65.7,68.3 65.7,69.9 65.8,70 ; v1(66.9,39.8) 66.9,43.3 ; v1(69.6,58.5) 70.8,57.3 70.8,47.9 66.9,44 66.9,43.3 ; R52.2@72.9,41.7 72.9,42.3 71.9,43.3 66.9,43.3 ; v1(81.5,103.5) 82,103.5 82.1,103.4 C42.1@82.1,102 ; C46.1@81.75,64.3 D38.1@78.9,64.3 78.9,65.7 77.8,66.8 73,66.8 73,67.9 70.9,70 65.8,70 ; v1(90.9,134.9) 90.9,120.2 95.4,120.2 ; R83.2@95.9,114.7 95.9,117.25 D25.6@95.4,117.25 95.4,120.2 ; v1(103.2,114.7) R82.2@102.1,114.7 102.1,117.25 D22.6@101.7,117.25 101.7,120.2 ; R85.2@107.4,114.7 108.04,114.7 D33.6@108.04,117.31 108.04,120.2 ; D31.16@113.6,102.9 113.6,100.2 v1@116.2,100.2 ; R84.2@114.4,114.8 114.34,114.8 D32.6@114.34,117.31 114.34,119.34 ; C37.1@116.2,102.25 v1(116.2,100.3) v1@116.2,100.2 ; R77.2@116.975,59.6 117.375,59.2 R88.2@125.8,59.2 ; R34.2@119.1,100.2 v1@116.2,100.2 ; D21.6@121.72,119.15 121.72,121.2 ; D17.6@128.32,119.15 128.32,121.2 ; D30.16@129.1,102.9 129.1,102.2 C41.1@133,102.2 133,99.9 R32.2@136.8,99.9 ; 129.6,57.1 C32.1@127.65,57.1 127.65,57.65 127,58.3 126,58.3 125.8,58.5 R88.2@125.8,59.2 ; D14.6@134.92,119.15 134.92,120.4 ; R81.2@139.3,80.7 144,80.7 144.25,80.95 C54.1@144.25,82.2 144.25,84.57 D18.14@144.2,84.62 D18.13@142.93,84.62 D18.12@141.66,84.62 ; C39.1@140.4,120.4 134.92,120.4 ; 144.5,83.9 144.6,84 v1(145.1,84) ; D24.16@145.5,102.9 147.7,102.9 ; R78.2@146.1,92.6 146.4,92.9 v1(148.8,92.9) D23.16@150.6,92.9 ; C44.1@147.7,75.4 153.7,75.4 ; R31.2@147.7,101.8 147.7,102.9 ; C43.1@150.1,105.6 147.7,105.6 v1(147.7,103.6) 147.7,102.9 ; C36.1@150.85,90.4 150.85,89.45 151.3,89 153,89 153.7,88.3 153.7,75.4 ; 95.4,120.2 101.7,120.2 ; 101.7,120.2 108.04,120.2 ; 108.04,120.2 114.34,120.2 114.34,119.34 ; 114.34,119.34 116.2,121.2 v1(116.5,121.2) 121.72,121.2 ; 121.72,121.2 128.32,121.2 ; R88.2@125.8,59.2 125.8,64.4 127.2,65.8 130.6,65.8 131.5,64.9 131.5,62.7 132.925,61.275 137.962,61.275 140.137,63.45 145.163,63.45 148.913,59.7 153.7,59.7 153.7,75.4 ; 128.32,121.2 134.92,121.2 134.92,120.4
  Bottom Layer w0.5: C57.1@46.65,62.4 46.6,62.35 46.6,60.9 53.9,60.9 58.1,65.1 v1(58.1,69.8) ; R169.2@46.7,105.2 46.7,107.2 51.2,111.7 R72.2@59.2,111.7 R72.2@59.27,111.7 ; R70.2@59.3,81.64 59.3,82.54 61.5,84.74 61.5,91.54 ; P5.2@64.7,32.4 64.7,37.6 v1(66.9,39.8) ; v1(69.6,58.5) 75.4,64.3 v1(80.1,64.3) ; P28.1@76.57,120.03 74.77,120.03 71.47,123.33 64.17,123.33 63.17,122.33 62.27,122.33 61.47,121.53 ; P27.1@76.6,90.04 74.8,90.04 71.5,93.34 64.2,93.34 v1(63.2,92.34) 62.3,92.34 61.5,91.54 ; v1(81.5,103.5) 80.02,104.98 P29.1@76.6,104.98 74.8,104.98 71.5,108.28 64.2,108.28 63.2,107.28 62.3,107.28 61.5,106.48 ; v1(90.9,134.9) 90.9,135.18 P30.1@76.59,135.18 74.79,135.18 71.49,138.48 64.19,138.48 63.19,137.48 62.29,137.48 61.49,136.68 61.49,129.88 59.29,127.68 59.29,123.71 61.47,121.53 ; v1(103.2,114.7) 103.2,108.6 R35.2@106,105.8 112.4,105.8 116.2,102 ; v1(116.2,100.3) 116.2,102 ; v1(116.5,121.2) 116.8,121.5 R76.2@120.5,121.5 133.5,121.5 R74.2@133.6,121.4 136.45,121.4 C53.1@136.5,121.35 ; R79.2@139.3,95.5 R80.2@133.8,95.5 133.8,98.4 v1(130.1,102.1) 129.4,102.8 ; v1(145.1,84) 148.8,87.7 v1(148.8,92.9) 150.7,94.8 150.7,100.5 148.4,102.8 146.9,102.8 ; v1(147.7,103.6) 146.9,102.8 ; R72.2@59.27,111.7 59.27,108.71 61.5,106.48 ; R72.2@59.27,111.7 59.27,112.53 61.47,114.73 61.47,121.53 ; 61.5,91.54 59.3,93.74 59.3,97.48 61.5,99.68 61.5,106.48 ; 116.2,102 117,102.8 129.4,102.8 ; 129.4,102.8 146.9,102.8
  Bottom Layer w1: C57.1@46.7,62.4 R179.2@46.7,65.1 R178.2@46.7,69.1 R177.2@46.7,73.1 R176.2@46.7,77.1 R175.2@46.7,81.1 R174.2@46.7,85.1 R173.2@46.7,89.1 R172.2@46.7,93.1 R171.2@46.7,97.1 R170.2@46.7,101.1 R169.2@46.7,105.2
  other v1: 63.79,137.8
+15: C60.1 C61.1 C62.1 D39.8 P26.1 R53.2 R155.1 R167.1 | length 102.7
  Top Layer w0.35: v1@54.35,55.65 v1(54.4,55.6) D39.8@54.4,54.9
  Top Layer w0.5: P26.1@40.8,32.4 40.8,30.2 41.5,29.5 67.3,29.5 68,30.2 v1(68,36) ; v1(68.9,40.3) 70.4,40.3 R53.2@70.4,41.7
  Top Layer w0.65: v1@54.35,55.65 C60.1@54.35,57.3
  Top Layer w1: v1(29.4,39.2) 29.4,40.8 C62.1@30,41.4 30,43.2 31.8,45 v1(35.2,45)
  Bottom Layer w0.5: v1(68,36) 68.9,36.9 v1(68.9,40.3)
  Bottom Layer w1: v1(29.4,39.2) 37.75,39.2 C61.1@41.65,35.3 41.65,32.4 P26.1@40.8,32.4 ; v1(35.2,45) 35.2,45.6 R155.1@36.5,46.9 36.5,47.9 38.1,49.5 R167.1@55.1,49.5 54.4,50.2 v1(54.4,55.6)
+24V: D19.9 D20.9 D35.9 P4.8 P6.4 P12.8 P17.8 R19.1 R28.1 R29.1 | length 139.8
  Top Layer w0.25: D35.9@145.275,49.81 150.09,49.81 153.2,46.7 153.2,41.7 160,34.9 161.62,34.9 P4.8@163.3,36.58
  Top Layer w0.35: D19.9@156,61.91 158.39,61.91 159.3,61 161.72,61 P17.8@163.3,62.58 164.525,61.355 ; D20.9@156,78.43 158.29,78.43 158.9,77.82 162.32,77.82 P12.8@163.6,79.1 164.525,78.175 164.525,61.355 ; P4.8@163.3,36.58 164.525,37.805 164.525,61.355
  Top Layer w0.5: P6.4@123,138.1 117.32,132.42 117.32,124.3 118.72,122.9 123.22,122.9 ; R29.1@123.22,127.5 123.22,122.9 ; R28.1@129.82,127.5 129.82,122.9 ; R19.1@135.92,127.5 136.42,127.5 136.42,122.9 129.82,122.9 ; 123.22,122.9 129.82,122.9
-15: C63.2 C64.2 C65.2 D39.4 P26.3 R154.2 R166.2 | length 43.6
  Top Layer w0.35: C63.2@46.75,50.9 C63.2@46.94,51.09
  Top Layer w0.5: P26.3@50.8,32.4 P26.3@51,32.4
  Top Layer w0.65: C63.2@46.94,51.09 D39.4@49.25,51.09
  Top Layer w1: C65.2@46,41.4 47.4,41.4 48.3,42.3 48.3,50.8 ; C65.2@46.1,41.3 47.7,41.3 v1(47.7,40)
  Bottom Layer w1: C64.2@50.25,35.3 50.7,35.3 50.7,37 v1(47.7,40) 46.3,40 R154.2@46.1,40.2 47.3,40.2 51,43.9 R166.2@60.2,43.9 ; P26.3@50.8,32.4 C64.2@50.8,35.4
AIN6: C7.1 D3.31 R38.2 R41.2 VD8.2 | length 34.3
  Top Layer w0.25: D3.31@95.56,67.713 95.56,62.958 105.9,52.618 VD8.2@105.9,45.2
  Top Layer w0.5: R38.2@105.9,37.7 VD8.2@105.9,45.2
AIN7: C8.1 D3.32 R39.2 R42.2 VD9.2 | length 38.7
  Top Layer w0.25: D3.32@96.06,67.713 96.06,63.094 109.854,49.3 111.8,49.3 114.4,46.7 VD9.2@114.4,45.2
  Top Layer w0.5: R39.2@114.4,37.7 VD9.2@114.4,45.2
AIN8: C11.1 D3.35 R46.2 R49.2 VD13.2 | length 61.9
  Top Layer w0.25: D3.35@97.56,67.713 97.56,63.504 110.414,50.65 126.314,50.65 129.914,47.05 136.35,47.05 138.2,45.2 VD13.2@140,45.2
  Top Layer w0.5: VD13.2@140,45.2 140,37.7 R46.2@140.1,37.6
AIN9: C12.1 D3.36 R47.2 R50.2 VD14.2 | length 69.9
  Top Layer w0.25: D3.36@98.06,67.713 98.06,63.64 110.6,51.1 126.5,51.1 130.1,47.5 137.9,47.5 138.2,47.2 146.6,47.2 VD14.2@148.6,45.2
  Top Layer w0.5: VD14.2@148.6,45.2 148.6,37.7 R47.2@148.7,37.6
AIN14: C9.1 D3.33 R40.2 R43.2 VD10.2 | length 46.7
  Top Layer w0.25: D3.33@96.56,67.713 96.56,63.231 110.041,49.75 119.95,49.75 122.9,46.8 VD10.2@122.9,45.2
  Top Layer w0.5: R40.2@122.9,37.7 VD10.2@122.9,45.2
AIN15: C10.1 D3.34 R45.2 R48.2 VD12.2 | length 53.9
  Top Layer w0.25: D3.34@97.06,67.713 97.06,63.367 110.227,50.2 126.1,50.2 131.1,45.2 VD12.2@131.4,45.2
  Top Layer w0.5: VD12.2@131.4,45.2 131.4,37.7 R45.2@131.5,37.6
B_1: D18.2 R79.1 VT2.3 | length 17.7
  Top Layer w0.5: VT2.3@128.5,91.92 128.6,92.02 142,92.02 142.93,91.09 D18.2@142.93,89.77
  Bottom Layer w0.5: R79.1@139.3,93.5 139.3,92.5 v1(139.7,92.1)
B_2: D18.5 R80.1 VT3.3 | length 16
  Top Layer w0.5: VT3.3@131.8,85.4 131.8,88.62 134.5,91.32 138.8,91.32 139.12,91 D18.5@139.12,89.77
  Bottom Layer w0.5: v1(133.7,90.6) 133.7,93.4 R80.1@133.8,93.5
B_3: D18.10 R81.1 VT4.3 | length 9.9
  Top Layer w0.25: D18.10@139.1,84.6 D18.10@139.12,84.62
  Top Layer w0.5: VT4.3@131.7,80.8 136.9,80.8 139.1,83 139.1,83.544 D18.10@139.1,84.6
CAP_1: C2.1 D3.49 | length 3.6
  Top Layer w0.25: D3.49@104.56,67.713 104.56,66.44 105.6,65.4 C2.1@106.5,65.4
CAP_2: C3.1 D3.73 | length 5.3
  Top Layer w0.25: D3.73@106.785,80.438 111.438,80.438 C3.1@111.9,80.9
D: D18.1 D18.4 D18.9 R78.1 VT1.3 | length 21.4
  Top Layer w0.5: VT1.3@138.2,94.42 141.7,94.42 144.2,91.92 D18.1@144.2,89.77
  Bottom Layer w0.5: v1(137.8,83.5) 140.4,86.1 v1(140.4,90.8) v1(144.2,90.8)
DAC_1: D3.29 R158.2 | length 60.6
  Top Layer w0.25: R158.2@44.2,55.5 44.2,58.2 46.15,60.15 93.214,60.15 94.56,61.496 D3.29@94.56,67.713
DAC_2: D3.30 R160.2 | length 44.9
  Top Layer w0.25: R160.2@59.4,54.4 64.7,59.7 93.4,59.7 95.06,61.36 D3.30@95.06,67.713
EN_D1: D3.71 R12.1 | length 25.5
  Top Layer w0.25: D3.71@106.785,79.438 120.038,79.438 121.72,81.12 R12.1@121.72,91
EN_D2: D3.70 R22.1 | length 21
  Top Layer w0.25: D3.70@106.785,78.938 120.238,78.938 125.22,83.92 R22.1@125.22,84.4
EN_D3: D3.69 R23.1 | length 19
  Top Layer w0.25: D3.69@106.785,78.438 123.838,78.438 R23.1@125.2,79.8
EN_OUT2: C31.1 D3.45 D34.1 D34.19 R88.1 | length 52.4
  Top Layer w0.25: D3.45@102.56,67.713 102.56,65.477 112.087,55.95 130.425,55.95 D34.19@130.425,57.3 130.425,59.075 v1(130.4,59.1) 130.3,59.2 R88.1@127.8,59.2 ; v1(128.7,51) 128.975,50.725 129.775,50.725 D34.1@129.775,51.3
  Bottom Layer w0.5: v1(128.7,51) 130.4,52.7 v1(130.4,59.1) C31.1@132.35,59.1
GND: C1.2 C2.2 C3.2 C4.1 C5.2 C6.2 C7.2 C8.2 C9.2 C10.2 C11.2 C12.2 C17.2 C18.2 C19.2 C20.2 C21.2 C22.2 C23.2 C24.2 C25.2 C26.2 C27.2 C28.2 C29.2 C30.2 C31.2 C32.2 C33.2 C36.2 C37.2 C38.2 C39.2 C40.2 C41.2 C42.2 C43.2 C44.2 C45.2 C46.2 C47.2 C48.2 C49.2 C50.2 C51.2 C52.2 C53.2 C54.2 C55.2 C56.2 C57.2 C58.2 C59.2 C60.2 C61.2 C62.2 C63.1 C64.1 C65.1 C66.2 C67.2 C68.2 C69.2 C70.2 C71.2 C72.2 C73.2 C74.2 C75.2 C76.2 D1.3 D2.3 D3.10 D3.20 D3.27 D3.37 D3.74 D3.94 D3.99 D4.3 D5.3 D6.3 D7.3 D8.3 D9.3 D10.3 D11.3 D12.3 D13.3 D14.4 D15.2 D16.2 D17.4 D18.7 D19.8 D20.8 D21.4 D22.4 D23.8 D23.13 D24.8 D24.13 D25.4 D26.7 D26.8 D27.7 D27.8 D28.7 D28.8 D29.7 D29.8 D30.8 D30.13 D31.8 D31.13 D32.4 D33.4 D34.10 D34.11 D35.8 D36.4 D37.4 D38.3 P1.3 P2.9 P2.10 P5.1 P11.4 P13.1 P13.3 P13.5 P14.1 P14.3 P14.5 P25.2 P25.4 P26.2 P27.3 P28.3 P29.3 P30.3 R6.1 R15.1 R16.1 R24.1 R25.1 R41.1 R42.1 R43.1 R48.1 R49.1 R50.1 R58.1 R61.1 R63.1 R65.1 R156.2 R162.1 R163.1 R164.2 VD8.1 VD9.1 VD10.1 VD12.1 VD13.1 VD14.1 VT1.2 VT2.2 VT3.2 VT4.2 VT7.2 VT8.2 VT9.2 VT10.2 | length 43.7
  Top Layer w0.25: D3.20@91.335,71.938 93.038,71.938 ; D3.10@91.335,76.938 93.062,76.938 ; v1(91.7,68.5) v1@92.1,68.5 ; v1(92.1,82.4) 93.3,81.1 ; D3.27@93.56,67.713 93.56,69.76 ; 93.56,80.84 D3.99@93.56,83.163 ; 96.06,81.46 D3.94@96.06,83.163 ; D3.37@98.56,67.713 98.56,69.44 ; 104.838,80.938 D3.74@106.785,80.938 ; 105,69.5 105.9,68.6 v1(106.7,68.6) 107.712,68.6 108.012,68.9 111.9,68.9 v1(112.5,68.3) ; 105.1,81.5 v1(106.1,82.5)
  Top Layer w0.5: C24.2@119.475,63.55 120.065,64.14 D13.3@122.675,64.14 ; R16.1@124.32,91 VT2.2@126.22,91 ; R25.1@127.8,79.8 VT4.2@129.7,79.8 ; R24.1@127.82,84.4 VT3.2@129.72,84.4 ; R15.1@134.3,93.42 VT1.2@136.2,93.42
  Top Layer w0.65: R58.1@75.9,56.1 VT8.2@77.8,56.1 ; VT10.2@77.9,49 R63.1@77.9,50.9 ; VT9.2@92.4,48.9 R65.1@92.4,50.8 ; R61.1@95,56 VT7.2@96.9,56
  other v1: 104.8,29.6 127.4,30.5 148.7,31.3 102.2,35.3 85.6,35.4 118.6,35.4 111.3,35.6 127.4,35.8 75.5,39 85.5,39.5 60.7,39.8 94.3,39.8 143.9,40.1 152.4,40.1 109.7,40.2 118.3,40.2 126.7,40.2 135.2,40.2 55.4,40.7 35.6,41.4 40.3,41.4 102.9,41.6 118.2,42.6 126.7,42.7 135.2,42.7 143.8,42.7 152.3,42.7 109.6,42.8 75.3,44.8 110.6,45.2 144.8,45.2 119.2,45.3 127.7,45.3 136.2,45.3 67.6,46.8 151.8,46.8 139.5,48.6 103,48.7 76.9,49.2 91.4,49.2 82.9,50.3 43.2,50.9 65.6,50.9 38,52.8 136.2,52.9 61.9,53.3 156.3,53.5 101.4,54.8 96.5,55.1 83.3,55.6 90.2,55.8 136.5,55.8 69.4,56.3 124,57.1 114.8,57.3 65.3,57.9 155.8,57.9 52.4,58.9 60.8,59 142.5,59 47.9,59.1 96.1,60.2 39.1,60.6 64.1,61.1 152.2,61.1 109.4,61.2 75.3,62.4 83.7,62.4 53.1,63.5 70.2,63.9 73.2,64.2 121.2,65 111.3,65.3 64.2,65.4 84.4,66.1 35.1,66.9 140.3,67.1 53.1,67.6 94.9,70.6 103.2,70.6 53.1,71.6 65.5,72 156.2,74.7 99.4,74.9 53.1,75.6 141.9,75.8 61.2,76.8 70.6,78.2 77,78.2 80.1,78.2 148.6,78.4 129.7,78.8 53.1,79.6 95.1,80.3 103,80.3 140.4,82.4 53.1,83.5 130.8,83.8 85.4,84.9 111.9,86.3 53.1,87.5 86.6,88.8 135.5,89.7 127.2,90.2 154.6,90.4 53.1,91.5 106,91.9 137.3,93 76.3,93.3 61.3,94.2 153.7,94.5 88.8,94.6 66.8,94.7 53.1,95.5 82,96 75,97.9 53.1,99.6 35.9,100.1 91.7,100.3 135,101.3 155.8,102.8 150.2,103.5 53.1,103.6 117.8,104.2 98.8,104.4 88.2,104.6 129.4,104.8 146.2,104.8 104.3,105.1 155.9,105.5 127,106 42.3,106.1 143.5,106.1 91.5,106.9 131.5,107.2 83.3,107.7 96.8,107.8 119.2,108.1 135.6,108.1 104.7,109.6 67.7,109.7 91.5,111.9 88.1,113 73.6,113.7 58.2,114.5 80.6,116.3 45.2,116.4 91.7,117.2 98,117.2 104.3,117.2 110.6,117.2 150.2,118.3 118,119.2 124.6,119.2 131.2,119.2 58.7,120.6 39.9,120.8 103.8,123.4 109.9,123.4 97.3,123.5 154.6,123.8 84.3,123.9 88.8,123.9 50.9,124.7 67.4,124.8 139.1,125.6 35.4,125.7 78.6,125.9 73.5,128.9 58.9,129.2 95.7,130.3 100.1,130.8 47.8,130.9 112.4,130.9 107.7,131.1 155.9,131.8 115.4,132.5 141.3,132.6 103.6,132.7 92.6,132.8 129.5,132.8 123.3,132.9 134.4,133
I1: P3.1 R1.1 | length 7.6
  Top Layer w0.35: P3.1@28.96,94.7 30.185,95.925 36,95.925 R1.1@36,95.9
I2: P3.3 R4.1 | length 7.5
  Top Layer w0.35: P3.3@28.96,92.16 30.22,93.42 R4.1@35.98,93.42
I3: P3.5 R7.1 | length 7.6
  Top Layer w0.35: P3.5@28.96,89.62 30.26,90.92 R7.1@35.98,90.92
I4: P3.7 R9.1 | length 7.5
  Top Layer w0.35: P3.7@28.96,87.08 30.22,88.34 R9.1@35.96,88.34
I5: P3.9 R13.1 | length 7.5
  Top Layer w0.35: P3.9@28.96,84.54 30.26,85.84 R13.1@35.96,85.84
I6: P3.11 R2.1 | length 7.5
  Top Layer w0.35: P3.11@28.96,82 30.22,83.26 R2.1@35.96,83.26
I7: P3.13 R5.1 | length 7.6
  Top Layer w0.35: P3.13@28.96,79.46 30.26,80.76 R5.1@36,80.76
I8: P3.15 R8.1 | length 7.5
  Top Layer w0.35: P3.15@28.96,76.92 30.22,78.18 R8.1@35.98,78.18
I9: P3.17 R10.1 | length 7.6
  Top Layer w0.35: P3.17@28.96,74.38 30.26,75.68 R10.1@35.98,75.68
I10: P3.19 R14.1 | length 7.6
  Top Layer w0.35: P3.19@28.96,71.84 30.22,73.1 R14.1@36,73.1
I11: P3.21 R17.1 | length 7.6
  Top Layer w0.35: P3.21@28.96,69.3 30.26,70.6 R17.1@36,70.6
I12: P18.1 R18.1 | length 20.7
  Top Layer w0.25: R18.1@144.4,61.3 145.2,61.3 156,50.5 P18.1@160.6,50.5
I_11: D1.2 P3.2 | length 20.7
  Top Layer w0.35: P3.2@31.5,94.7 40.3,94.7 40.3,99.7 44.16,103.56 D1.2@45.6,103.56
I_12: D4.2 P3.4 | length 19.3
  Top Layer w0.35: P3.4@31.5,92.16 31.56,92.1 40.5,92.1 41.9,93.5 41.9,97.1 44.36,99.56 D4.2@45.6,99.56
I_13: D6.2 P3.6 | length 17.9
  Top Layer w0.35: P3.6@31.5,89.62 31.52,89.6 40.3,89.6 43.5,92.8 43.5,95.1 43.96,95.56 D6.2@45.6,95.56
I_14: D8.2 P3.8 | length 16
  Top Layer w0.35: P3.8@31.5,87.08 31.58,87 40.4,87 43.9,90.5 44.96,91.56 D8.2@45.6,91.56
I_15: D10.2 P3.10 | length 15.4
  Top Layer w0.35: P3.10@31.5,84.54 31.54,84.5 40.9,84.5 43.96,87.56 D10.2@45.6,87.56
I_16: D2.2 P3.12 | length 14.7
  Top Layer w0.35: P3.12@31.5,82 31.6,82.1 42.3,82.1 43.76,83.56 D2.2@45.6,83.56
I_17: D5.2 P3.14 | length 14.1
  Top Layer w0.35: P3.14@31.5,79.46 31.6,79.56 D5.2@45.6,79.56
I_18: D7.2 P3.16 | length 14.7
  Top Layer w0.35: P3.16@31.5,76.92 31.52,76.9 42.2,76.9 43.54,75.56 D7.2@45.6,75.56
I_19: D9.2 P3.18 | length 15.2
  Top Layer w0.35: P3.18@31.58,74.3 41.4,74.3 44.14,71.56 D9.2@45.6,71.56
I_20: D11.2 P3.20 | length 15.9
  Top Layer w0.35: P3.20@31.5,71.84 31.54,71.8 40.3,71.8 44.54,67.56 D11.2@45.6,67.56
I_21: D12.2 P3.22 | length 16.5
  Top Layer w0.35: P3.22@31.5,69.3 37.7,69.3 43.44,63.56 D12.2@45.6,63.56
I_22: D13.2 P18.2 | length 37.1
  Top Layer w0.25: D13.2@128.875,64.14 132.315,60.7 138.2,60.7 140.375,62.875 144.925,62.875 152.3,55.5 P18.2@160.6,55.5
IN_1_1: C66.1 D1.4 D3.2 R169.1 | length 64.9
  Top Layer w0.25: D1.4@51.8,106.1 53.1,106.1 55.8,103.4 55.8,85.149 55.899,85.05 58.232,85.05 61.464,81.818 88.782,81.818 89.662,80.938 D3.2@91.335,80.938
  Bottom Layer w0.5: R169.1@48.7,105.2 50.4,105.2 ; v1(50.4,106.14) 50.4,105.2 ; C66.1@52.05,105.2 50.4,105.2
IN_1_2: C67.1 D3.3 D4.4 R170.1 | length 61.4
  Top Layer w0.25: D4.4@51.8,102.1 52.5,102.1 55.35,99.25 55.35,84.962 55.712,84.6 58.046,84.6 61.278,81.368 88.595,81.368 89.526,80.438 D3.3@91.335,80.438
  Bottom Layer w0.5: R170.1@48.7,101.1 48.7,101.2 50.4,101.2 ; v1(50.4,102.14) 50.4,101.2 ; C67.1@52.15,101.2 50.4,101.2
IN_1_3: C68.1 D3.4 D6.4 R171.1 | length 58
  Top Layer w0.25: D6.4@51.8,98.1 52.7,98.1 54.825,95.975 54.825,84.851 55.526,84.15 57.86,84.15 61.091,80.918 88.409,80.918 89.389,79.938 D3.4@91.335,79.938
  Bottom Layer w0.5: R171.1@48.7,97.1 50.4,97.1 ; v1(50.4,98.04) 50.4,97.1 ; C68.1@52.15,97.1 50.4,97.1
IN_1_4: C69.1 D3.5 D8.4 R172.1 | length 54.7
  Top Layer w0.25: D8.4@51.8,94.1 53.142,94.1 54.375,92.867 54.375,84.665 55.34,83.7 57.673,83.7 60.905,80.468 88.222,80.468 89.253,79.438 D3.5@91.335,79.438
  Bottom Layer w0.5: R172.1@48.7,93.1 50.4,93.1 ; v1(50.4,94.04) 50.4,93.1 ; C69.1@52.05,93.1 50.4,93.1
IN_1_5: C70.1 D3.7 D10.4 R173.1 | length 51.5
  Top Layer w0.25: D10.4@51.8,90.1 53.142,90.1 53.925,89.317 53.925,84.478 55.153,83.25 57.487,83.25 60.718,80.018 88.036,80.018 89.616,78.438 D3.7@91.335,78.438
  Bottom Layer w0.5: R173.1@48.7,89.1 50.4,89.1 ; v1(50.4,90.04) 50.4,89.1 ; C70.1@52.05,89.1 50.4,89.1
IN_1_6: C71.1 D2.4 D3.8 R174.1 | length 48.1
  Top Layer w0.25: D2.4@51.8,86.1 53.142,86.1 53.35,85.892 53.35,84.417 54.967,82.8 57.3,82.8 60.532,79.568 87.85,79.568 89.48,77.938 D3.8@91.335,77.938
  Bottom Layer w0.5: R174.1@48.7,85.1 50.4,85.1 ; v1(50.4,86.04) 50.4,85.1 ; C71.1@52.05,85.1 50.4,85.1
IN_1_7: C72.1 D3.9 D5.4 R175.1 | length 45.8
  Top Layer w0.25: D5.4@51.8,82.1 57.364,82.1 60.364,79.1 87.682,79.1 89.344,77.438 D3.9@91.335,77.438
  Bottom Layer w0.5: R175.1@48.7,81.2 50.4,81.2 ; v1(50.4,82.14) 50.4,81.2 ; C72.1@52.05,81.2 50.4,81.2
IN_1_8: C73.1 D3.15 D7.4 R176.1 | length 45.3
  Top Layer w0.25: D7.4@51.8,78.1 54.9,78.1 58.562,74.438 D3.15@91.335,74.438
  Bottom Layer w0.5: R176.1@48.7,77.2 50.4,77.2 ; v1(50.4,78.14) 50.4,77.2 ; C73.1@52.05,77.2 50.4,77.2
IN_1_9: C74.1 D3.16 D9.4 R177.1 | length 43.3
  Top Layer w0.25: D9.4@52.4,74.1 52.562,73.938 D3.16@91.335,73.938
  Bottom Layer w0.5: R177.1@48.7,73.2 50.4,73.2 ; v1(50.4,74.14) 50.4,73.2 ; C74.1@52.05,73.2 50.4,73.2
IN_1_10: C75.1 D3.17 D11.4 R178.1 | length 45.2
  Top Layer w0.25: D11.4@51.8,70.1 54.7,70.1 58.038,73.438 D3.17@91.335,73.438
  Bottom Layer w0.5: R178.1@48.7,69.2 50.4,69.2 ; v1(50.4,70.14) 50.4,69.2 ; C75.1@52.05,69.2 50.4,69.2
IN_1_11: C76.1 D3.18 D12.4 R179.1 | length 47.4
  Top Layer w0.25: D12.4@51.8,66.1 53.8,66.1 54.6,66.9 54.6,68.2 59.338,72.938 D3.18@91.335,72.938
  Bottom Layer w0.5: R179.1@48.7,65.1 50.4,65.1 ; v1(50.4,66.04) 50.4,65.1 ; C76.1@52.05,65.1 50.4,65.1
IN_2_1: C21.1 D3.82 D14.5 R74.1 | length 66.6
  Top Layer w0.25: D3.82@102.06,83.163 102.06,94.496 105.3,97.736 v1(105.3,98.3) ; v1(103.2,100.8) 102.9,101.1 102.9,110 103.5,110.6 107.409,110.6 109.684,112.875 116.484,112.875 117.509,113.9 120.772,113.9 123.622,116.75 132.85,116.75 133.6,117.5 v1(133.6,117.7)
  Bottom Layer w0.25: v1(103.2,100.8) 103.2,100.4 v1(105.3,98.3)
  Bottom Layer w0.5: C21.1@133.6,115.95 v1(133.6,117.7) R74.1@133.6,119.4
IN_2_2: C22.1 D3.83 D17.5 R75.1 | length 60.3
  Top Layer w0.25: D3.83@101.56,83.163 101.56,94.633 104.1,97.173 v1(104.1,98.3) ; v1(101.9,100.8) 102.45,101.35 102.45,110.186 103.314,111.05 107.223,111.05 109.498,113.325 116.297,113.325 117.322,114.35 120.586,114.35 123.436,117.2 126.8,117.2 v1@127.05,117.45
  Bottom Layer w0.25: v1(101.9,100.8) 104.1,98.6 v1(104.1,98.3)
  Bottom Layer w0.5: C22.1@127.1,115.95 v1(127.1,117.7) R75.1@127.1,119.4
IN_2_3: C23.1 D3.84 D21.5 R76.1 | length 55.8
  Top Layer w0.25: v1(100.6,100.8) 100.6,100.9 102,102.3 102,110.373 103.127,111.5 107.036,111.5 109.311,113.775 116.111,113.775 117.136,114.8 119.4,114.8 120.45,115.85 v1(120.45,117.8) ; D3.84@101.06,83.163 101.06,94.769 102.9,96.609 v1(102.9,98.3)
  Bottom Layer w0.25: v1(100.6,100.8) 100.6,100.6 v1(102.9,98.3)
  Bottom Layer w0.5: C23.1@120.3,115.95 120.45,116.1 v1(120.45,117.8) 120.5,117.85 R76.1@120.5,119.5
IN_ADC_0: P13.2 R38.1 | length 7.4
  Top Layer w0.5: R38.1@106,35.6 109.4,32.2 P13.2@112,32.2
IN_ADC_1: P13.4 R39.1 | length 3.4
  Top Layer w0.5: R39.1@114.5,35.6 114.5,32.24 P13.4@114.54,32.2
IN_ADC_2: P13.6 R40.1 | length 7.3
  Top Layer w0.5: P13.6@117.08,32.2 119.6,32.2 R40.1@123,35.6
IN_ADC_3: P14.2 R45.1 | length 7.5
  Top Layer w0.5: R45.1@131.5,35.6 134.9,32.2 P14.2@137.6,32.2
IN_ADC_4: P14.4 R46.1 | length 3.4
  Top Layer w0.5: R46.1@140.1,35.6 140.1,32.24 P14.4@140.14,32.2
IN_ADC_5: P14.6 R47.1 | length 7.4
  Top Layer w0.5: P14.6@142.68,32.2 145.3,32.2 R47.1@148.7,35.6
M_IN_1: D26.15 P15.1 R89.1 | length 65.9
  Top Layer w0.24: P15.1@28.96,111.8 30.36,113.2 39.145,113.2 41.565,110.78 55.176,110.78 59.325,106.631 59.325,88.78 66.27,88.78 D26.15@66.27,90.04
  Top Layer w0.5: v1(66.2,92.34) 66.27,92.27 D26.15@66.27,90.04
  Bottom Layer w0.35: R89.1@63,90.84 63.5,90.84 64.9,92.24 66.1,92.24 v1(66.2,92.34)
M_IN_2: D26.14 P15.2 R90.1 | length 63.1
  Top Layer w0.24: P15.2@31.5,111.8 39.922,111.8 41.382,110.34 54.994,110.34 58.885,106.449 58.885,88.34 67.54,88.34 D26.14@67.54,90.04
  Top Layer w0.5: D26.14@67.54,90.04 v1@67.54,92.3
  Bottom Layer w0.35: R90.1@65.6,90.84 66.5,90.84 67,91.34 67,91.84 v1(67.5,92.34)
M_IN_3: D26.13 P15.3 R91.1 | length 66.7
  Top Layer w0.24: P15.3@28.96,109.26 30.3,110.6 40.1,110.6 40.8,109.9 54.811,109.9 58.445,106.266 58.445,87.9 68.81,87.9 D26.13@68.81,90.04
  Top Layer w0.5: D26.13@68.81,90.04 v1@68.81,92.33
  Bottom Layer w0.35: R91.1@68.2,90.84 68.8,91.44 v1(68.8,92.34)
M_IN_4: D26.12 P15.4 R92.1 | length 65.4
  Top Layer w0.24: P15.4@31.5,109.26 31.7,109.46 54.629,109.46 58.005,106.084 58.005,87.46 70.08,87.46 D26.12@70.08,90.04
  Top Layer w0.5: D26.12@70.08,90.04 70.08,92.32 v1(70.1,92.34)
  Bottom Layer w0.35: v1(70.1,92.34) 70.8,91.64 R92.1@70.8,90.84
M_IN_5: D26.1 P15.8 R93.1 | length 61.8
  Top Layer w0.24: P15.8@31.5,104.18 38.78,104.18 42.3,107.7 53.9,107.7 56.245,105.355 56.245,85.7 65,85.7 D26.1@65,84.89
  Top Layer w0.5: v1(65,82.69) D26.1@65,84.89
  Bottom Layer w0.35: R93.1@63,84.24 63,83.34 63.65,82.69 v1(65,82.69)
M_IN_6: D26.2 P15.7 R94.1 | length 64.7
  Top Layer w0.24: P15.7@28.96,104.18 30.28,105.5 39.3,105.5 41.94,108.14 54.082,108.14 56.685,105.537 56.685,86.14 66.27,86.14 D26.2@66.27,84.89
  Top Layer w0.5: D26.2@66.27,84.89 66.27,82.72 v1(66.3,82.69)
  Bottom Layer w0.35: R94.1@65.6,84.24 66.3,83.54 v1(66.3,82.69)
M_IN_7: D26.3 P15.6 R95.1 | length 62.8
  Top Layer w0.24: P15.6@31.5,106.72 39.675,106.72 41.535,108.58 54.265,108.58 57.125,105.72 57.125,86.58 67.54,86.58 D26.3@67.54,84.89
  Top Layer w0.5: D26.3@67.54,84.89 67.54,82.75 v1(67.6,82.69)
  Bottom Layer w0.35: v1(67.6,82.69) 67.6,83.64 R95.1@68.2,84.24
M_IN_8: D26.4 P15.5 R96.1 | length 68
  Top Layer w0.24: P15.5@28.96,106.72 30.24,108 40,108 41.02,109.02 54.447,109.02 57.565,105.902 57.565,87.02 68.81,87.02 D26.4@68.81,84.89
  Top Layer w0.5: D26.4@68.81,84.89 68.81,82.78 v1(68.9,82.69)
  Bottom Layer w0.35: v1(68.9,82.69) 68.9,82.94 70.2,84.24 R96.1@70.8,84.24
M_IN_9: D27.15 P16.1 R97.1 | length 56.3
  Top Layer w0.24: P16.1@28.96,123.9 30.26,125.2 32.156,125.2 43.056,114.3 56.634,114.3 62.845,108.089 62.845,103.8 66.2,103.8 D27.15@66.2,105.05
  Top Layer w0.5: D27.15@66.2,105.05 v1(66.2,107.28)
  Bottom Layer w0.35: R97.1@63,105.78 63.5,105.78 64.9,107.18 v1@66.1,107.18
M_IN_10: D27.14 P16.2 R98.1 | length 53.9
  Top Layer w0.24: P16.2@31.5,123.9 32.834,123.9 42.874,113.86 56.452,113.86 62.405,107.907 62.405,103.36 67.47,103.36 D27.14@67.47,105.05
  Top Layer w0.5: D27.14@67.47,105.05 v1(67.47,107.28)
  Bottom Layer w0.35: R98.1@65.6,105.78 66.5,105.78 67,106.28 67,106.78 v1@67.5,107.28
M_IN_11: D27.13 P16.3 R99.1 | length 57.4
  Top Layer w0.24: P16.3@28.96,121.36 30.2,122.6 33.511,122.6 42.691,113.42 56.269,113.42 61.965,107.724 61.965,102.92 68.74,102.92 D27.13@68.74,105.05
  Top Layer w0.5: D27.13@68.74,105.05 v1(68.74,107.28)
  Bottom Layer w0.35: R99.1@68.2,105.78 68.8,106.38 v1@68.8,107.28
M_IN_12: D27.12 P16.4 R100.1 | length 55.9
  Top Layer w0.24: P16.4@31.5,121.36 34.129,121.36 42.509,112.98 56.087,112.98 61.525,107.542 61.525,102.48 70.01,102.48 D27.12@70.01,105.05
  Top Layer w0.5: D27.12@70.01,105.05 v1(70.01,107.28)
  Bottom Layer w0.35: v1@70.1,107.28 70.8,106.58 R100.1@70.8,105.78
M_IN_13: D27.1 P16.8 R101.1 | length 49.6
  Top Layer w0.24: P16.8@31.5,116.28 36.72,116.28 41.78,111.22 55.358,111.22 59.765,106.813 59.765,100.72 64.93,100.72 D27.1@64.93,99.9
  Top Layer w0.5: v1(64.93,97.7) D27.1@64.93,99.9
  Bottom Layer w0.35: R101.1@62.93,99.25 62.93,98.35 63.58,97.7 v1(64.93,97.7)
M_IN_14: D27.2 P16.7 R102.1 | length 53.3
  Top Layer w0.24: P16.7@28.96,116.28 30.28,117.6 36.022,117.6 41.962,111.66 55.54,111.66 60.205,106.995 60.205,101.16 66.2,101.16 D27.2@66.2,99.9
  Top Layer w0.5: v1(66.2,97.7) D27.2@66.2,99.9
  Bottom Layer w0.35: R102.1@65.53,99.25 66.23,98.55 v1@66.23,97.7